# Altium PCB NAPaC_PCB1.PcbDoc
Units mm, origin at the board's own origin, x right, y up, seen from the top; angles counter-clockwise.
Board outline 59.06 x 40.1 mm, 2 copper layers (Top Layer, Bottom Layer); 50 components, 46 nets, 234 pads, 44 vias.
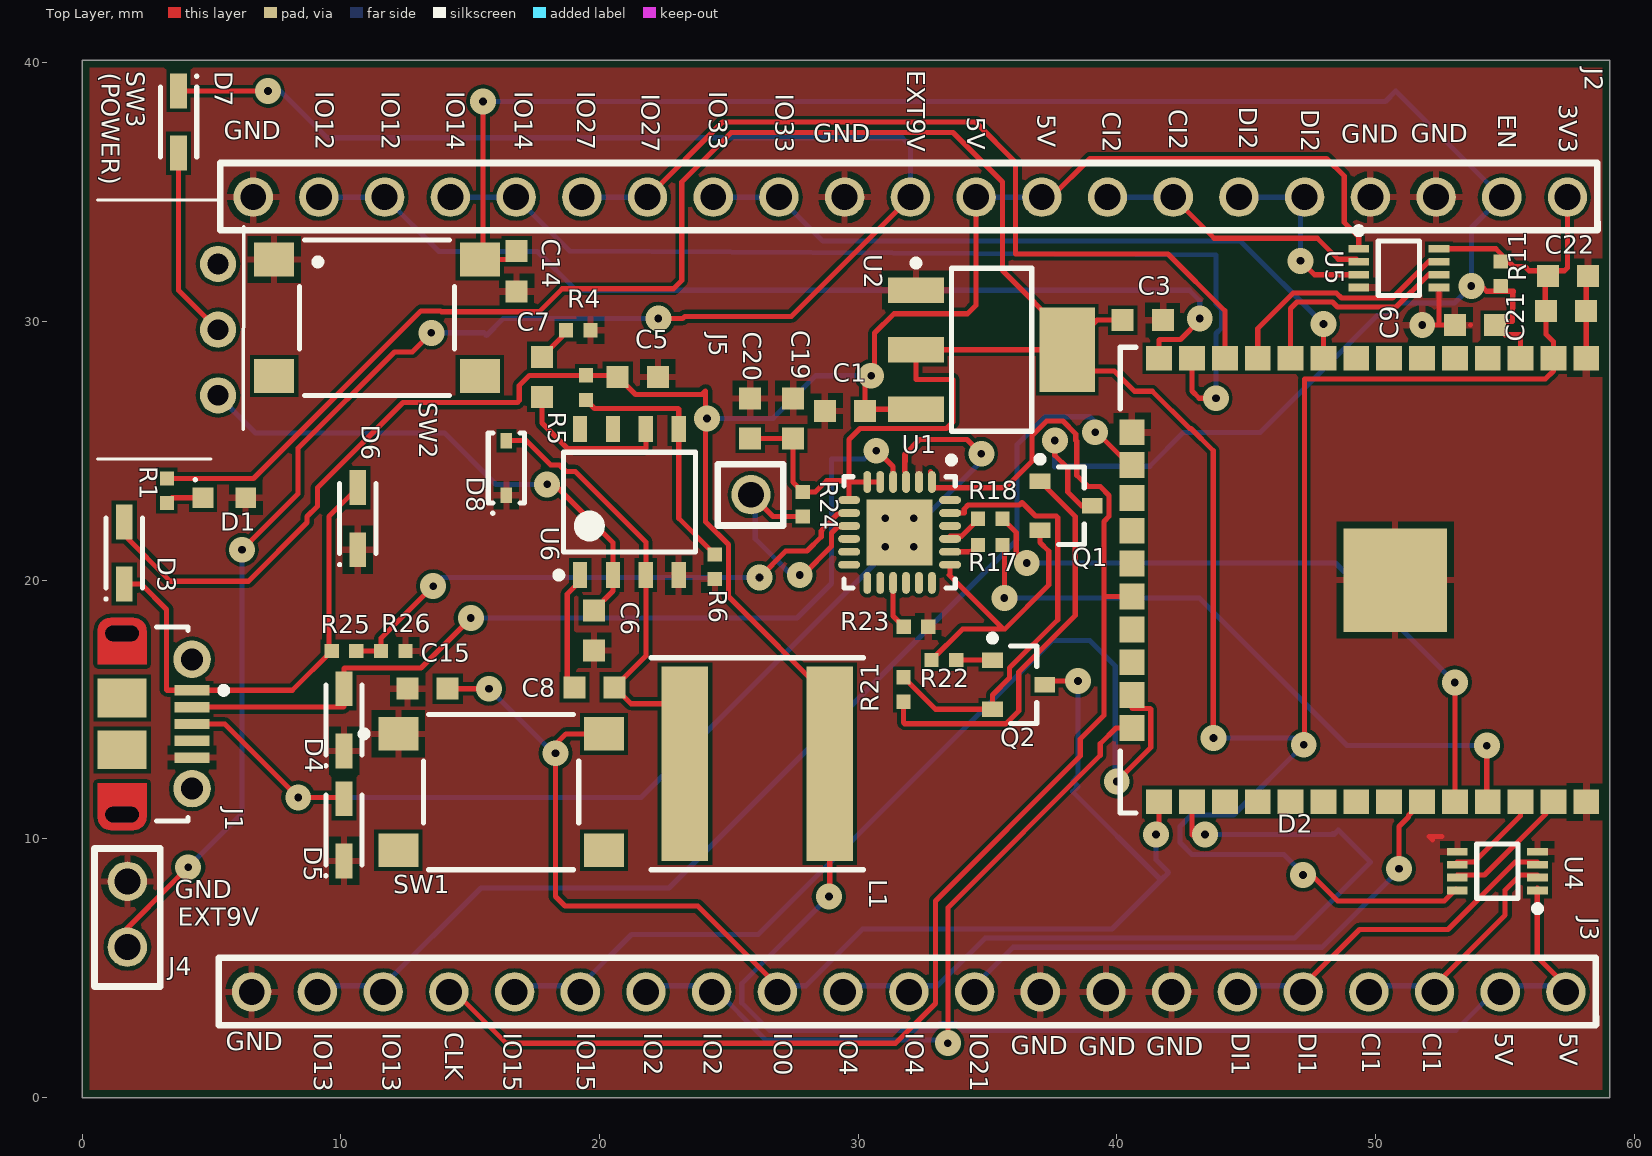
[diagram p0: Top Layer view]
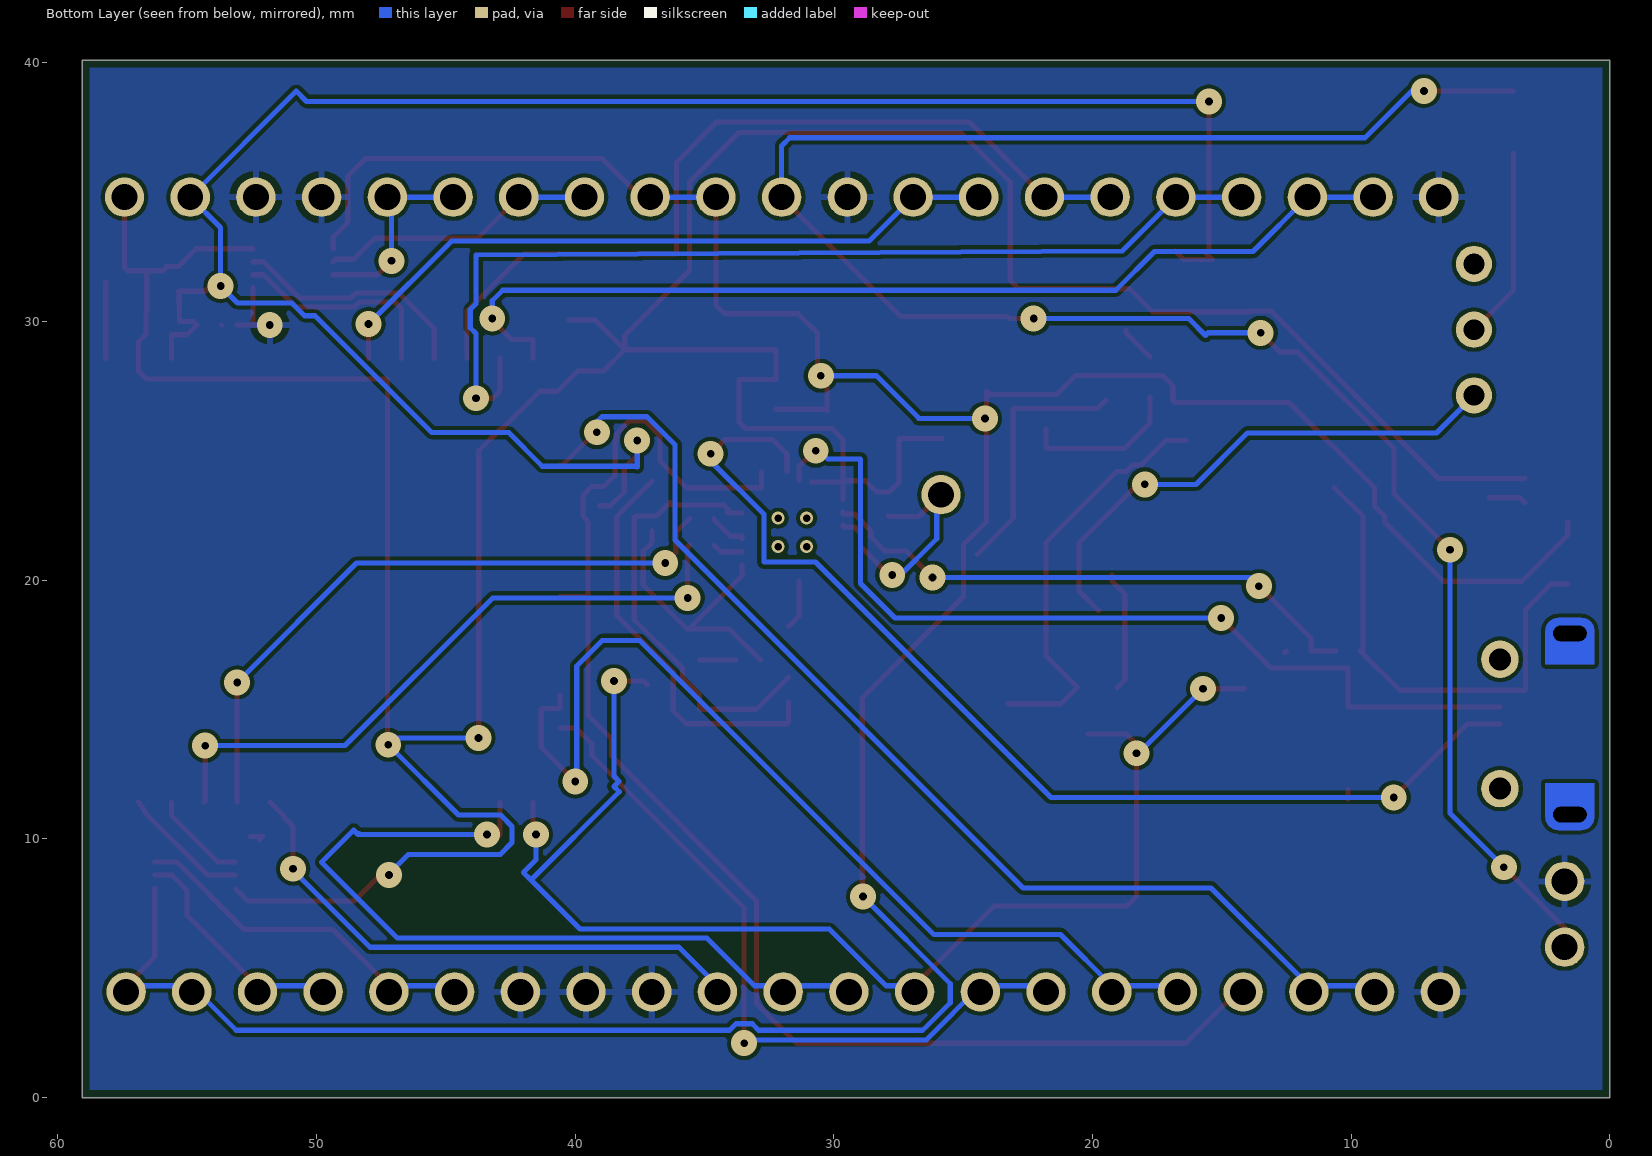
[diagram p1: Bottom Layer view, seen from below]
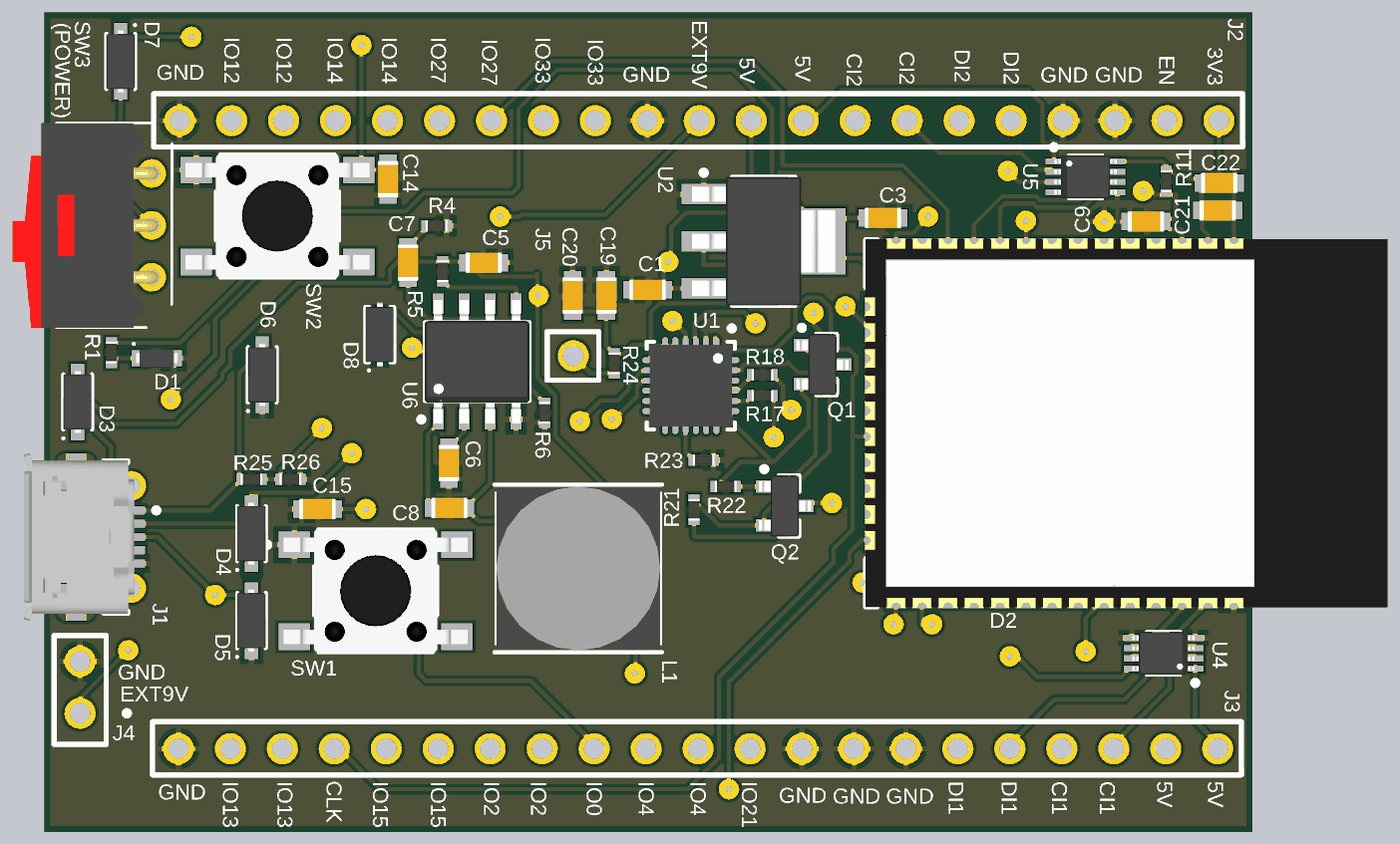
[diagram p2: 3D render of the assembled board from above, using the file's embedded part models]

## Layer stack, top to bottom
Top Solder: solder mask 0.0102, Solder Resist, Dk 3.5
Top Layer: signal copper 0.0356
Dielectric 1: dielectric 0.32, FR-4, Dk 4.8
Bottom Layer: signal copper 0.0356
Bottom Solder: solder mask 0.0102, Solder Resist, Dk 3.5

## Board outline
0,0 59.057,0 59.057,40.1 0,40.1

## Design rules (kind name [scope] priority, off if disabled: settings)
BoardOutlineClearance [All] p1: gap=0.3 ignorepadtopadclearanceinfootprint=FALSE
Clearance Clearance_1 [All] p1: gap=0.15 ignorepadtopadclearanceinfootprint=TRUE
HoleSize [All] p1: absolutevalues=TRUE maxlimit=2.54 minlimit=0.3 maxpercent=80.000 minpercent=20.000
HoleToHoleClearance [All] p1: gap=0.5 allowstackedmicrovias=TRUE
MinimumSolderMaskSliver [All] p1: minsoldermaskwidth=0.1
PlaneConnect [All] p1: planeconnectstyle=Relief reliefexpansion=0.3 reliefentries=4 reliefconductorwidth=0.2 reliefairgap=0.2
PolygonConnect [All] p1: connectstyle=Relief reliefconductorwidth=0.254 reliefentries=4 polygonreliefangle="90 Angle" airgapwidth=0.254
RoutingVias [All] p1: holewidth=0.5 width=1.2 viastyle="Through Hole" minholewidth=0.3 minwidth=1 maxholewidth=1.5 maxwidth=2.5
SilkToSilkClearance [All] p1: silktosilkclearance=0.15
SilkToSolderMaskClearance [IsPad] p1: minsilkscreentomaskgap=0.15 clearancetoexposedcopper=TRUE
SolderMaskExpansion [All] p1: expansion=0.05
UnRoutedNet [All] p1: checkbadconnections=TRUE
Width [All] p1: maxlimit=2 minlimit=0.15 preferedwidth=0.2
23 further rules are at their usual default settings.

## Components (designator, comment, footprint, x,y, rotation, side; value= is the part's Value field where it differs from the comment)
C1 "22uF/10V(20%)" CAPC0603 29.492,26.533 r0 top
C3 "22uF/10V(20%)" CAPC0603 40.999,30.047 r180 top
C5 "22uF/10V(20%)" CAPC0603 21.48,27.857 r180 top
C6 "10µF/35V(20%)" CAPC0603 19.78,18.057 r90 top
C7 "2.2nF/6.3V(10%)" CAPC0603 17.78,27.857 r270 top
C8 "10nF/50V(10%)" CAPC0603 19.805,15.857 r0 top
C9 "0.1uF/50V(10%)" CAPC0603 53.846,29.863 r0 top
C14 "0.1uF/50V(10%)" CAPC0603 16.799,31.939 r90 top
C15 "0.1uF/50V(10%)" CAPC0603 13.357,15.8 r0 top
C19 "0.1uF/50V(10%)" CAPC0603 27.478,26.248 r270 top
C20 "4.7uF/6.3V(10%)" CAPC0603 25.827,26.248 r270 top
C21 "22uF/10V(20%)" CAPC0603 57.357,30.409 r180 top
C22 "0.1uF/50V(10%)" CAPC0603 57.429,31.758 r180 top
D1 "SML-D12U1WT86" SML-D12U1WT86 5.5,23.18 r0 top
D2 "ESP32-WROOM-32" OLMX-ESP-WROOM-32 49.362,20 r270 top
D3 "BAT760" SOD-323 1.63,21.042 r90 top
D4 "CDSOD323-T05LC" SOD-323 10.126,14.6 r90 top
D5 "CDSOD323-T05LC" SOD-323 10.126,10.347 r90 top
D6 "CDSOD323-T05LC" SOD-323 10.657,22.372 r90 top
D7 "BAT760" SOD-323 3.731,37.7 r270 top
D8 "B140WS-7" SOD-323-SCHOTTKY_DIODE-40V/1A 16.399,24.335 r90 top
J1 "47491-0001" USB-MICRO-B_V 2.9,14.438 r270 top
J2 "CON_21P" PINS_HEADER-21 57.417,34.8 r180 top
J3 "CON_21P" PINS_HEADER-21 57.357,4.08 r180 top
J4 "CON_2P" PINS_ALIM-2 1.75,5.815 r90 top
J5 "PIN_TESTPOINT" PIN_TESTPOINT 25.857,23.3 r0 top
L1 "15uH/2.4A" NRS8040-SELF-15uH/2.4A 26.1,12.9 r0 top
Q1 "S8050-G-NPN" SOT23 38.038,22.87 r0 top
Q2 "S8050-G-NPN" SOT23 36.199,15.957 r0 top
R1 "2K(5%)" RC0402 3.281,23.455 r90 top
R4 "15K(5%)" RC0402 19.18,29.657 r180 top
R5 "28.7K(1%)" RC0402 19.48,27.438 r90 top
R6 "10K(1%)" RC0402 24.457,20.516 r90 top
R11 "10K(5%)" RC0402 54.835,31.841 r90 top
R17 "0R(5%)" RC0402 35.102,21.356 r180 top
R18 "0R(5%)" RC0402 35.102,22.372 r180 top
R21 "10K(5%)" RC0402 31.754,15.769 r270 top
R22 "10K(5%)" RC0402 33.311,16.907 r0 top
R23 "10K(5%)" RC0402 32.232,18.2 r180 top
R24 "2K(5%)" RC0402 27.857,22.93 r270 top
R25 "22.1K(5%)" RC0402 10.126,17.262 r0 top
R26 "47.5K(5%)" RC0402 12.031,17.262 r180 top
SW1 "PTS645S" CKCP-PTS645S_V 16.199,11.806 r0 top
SW2 "PTS645S" CKCP-PTS645S_V 11.399,30.139 r0 top
SW3 "SWITCH_SLIDE" SW_SLIDE 5.255,29.679 r90 top
U1 "CP2102N-A01-GQFN24" CP2102N-GQFN24 31.6,21.842 r270 top
U2 "LM1117IMP3.3/NOPB" LM1117 35.157,28.904 r0 top
U4 "SN74LVC2T45DCTRE4" VOLTAGE_TRANSLATOR_3.3-5V 54.707,8.75 r180 top
U5 "SN74LVC2T45DCTRE4" VOLTAGE_TRANSLATOR_3.3-5V 50.9,32.054 r0 top
U6 "ACT4060ASH-T" SWITCHING_VOLTAGE_REGULATOR 21.157,23.016 r90 top

## Footprints (in the part's own frame and the unit in brackets; to place one, negate y for a bottom-side part, rotate by r counter-clockwise, add the part's x,y. Pads: shape width x height; smd on the part's side, far side on the other; paste and mask are expansions set on the pad)
CAPC0603 [mm] "Chip Capacitor, 2-Leads, Body 1,60x0,80mm, IPC Medium Density"
  rect 0.85x0.85 smd: 1(-0.775,0) 2(0.775,0)
  body extent -0.9,-0.5 0.9,0.5, height 1
CKCP-PTS645S_V [mm] "THD, 4-Leads, Body 6x6mm, Pitch 4.5mm"
  rect 1.55x1.3 smd: 1(-3.975,2.25) 2(3.975,2.25) 3(-3.975,-2.25) 4(3.975,-2.25)
  silkscreen extent -5.42,-3 3,3, body extent -4.5,-3 4.5,3, height 4.3
CP2102N-GQFN24 [mm] "QFN, 24-Leads, Body 4,00x4,00mm, Pitch 0,50mm, Thermal Pad 2,55x2,55mm, IPC Medium Density"
  oval 0.85x0.3 smd: 1(-1.95,1.25) 2(-1.95,0.75) 3(-1.95,0.25) 4(-1.95,-0.25) 5(-1.95,-0.75) 6(-1.95,-1.25) 13(1.95,-1.25) 14(1.95,-0.75) 15(1.95,-0.25) 16(1.95,0.25) 17(1.95,0.75) 18(1.95,1.25)
  oval 0.3x0.85 smd: 7(-1.25,-1.95) 8(-0.75,-1.95) 9(-0.25,-1.95) 10(0.25,-1.95) 11(0.75,-1.95) 12(1.25,-1.95) 19(1.25,1.95) 20(0.75,1.95) 21(0.25,1.95) 22(-0.25,1.95) 23(-0.75,1.95) 24(-1.25,1.95)
  rect 2.55x2.55 smd: 25(0,0)
  silkscreen extent -2.92,-2.15 2.15,2.15, body extent -2.01,-2.01 2.01,2.01, height 0.8
LM1117 [mm] "SOT223, 4-Leads, Body 6,50x7,00mm (avg), Pitch 2,30mm, IPC Medium Density"
  rect 2.15x1 smd: 1(-2.925,2.3) 2(-2.925,0) 3(-2.925,-2.3)
  rect 2.15x3.25 smd: 4(2.925,0)
  silkscreen extent -3.05,-3.15 1.55,3.47, body extent -3.5,-3.15 3.5,3.15, height 1.8
NRS8040-SELF-15uH/2.4A [mm] "Precision Wire Wound Inductor, 2-Leads, Body 8,00x8,00mm, IPC Medium Density"
  rect 1.8x7.5 smd: 1(-2.8,0) 2(2.8,0)
  silkscreen extent -4.1,-4.1 4.1,4.1, body extent -4.1,-4 4.1,4, height 4.1
OLMX-ESP-WROOM-32 [mm] "SMD, 38-Leads, Body 18x25.5mm, Pitch 1.27mm"
  rect 0.95x1 smd: 1(-8.575,8.78) 2(-8.575,7.51) 3(-8.575,6.24) 4(-8.575,4.97) 5(-8.575,3.7) 6(-8.575,2.43) 7(-8.575,1.16) 8(-8.575,-0.11) 9(-8.575,-1.38) 10(-8.575,-2.65) 11(-8.575,-3.92) 12(-8.575,-5.19) 13(-8.575,-6.46) 14(-8.575,-7.73) 25(8.575,-7.73) 26(8.575,-6.46) 27(8.575,-5.19) 28(8.575,-3.92) 29(8.575,-2.65) 30(8.575,-1.38) 31(8.575,-0.11) 32(8.575,1.16) 33(8.575,2.43) 34(8.575,3.7) 35(8.575,4.97) 36(8.575,6.24) 37(8.575,7.51) 38(8.575,8.78)
  rect 4x4 smd: 1(0,1.395)
  rect 1x0.95 smd: 15(-5.715,-8.78) 16(-4.445,-8.78) 17(-3.175,-8.78) 18(-1.905,-8.78) 19(-0.635,-8.78) 20(0.635,-8.78) 21(1.905,-8.78) 22(3.175,-8.78) 23(4.445,-8.78) 24(5.715,-8.78)
  silkscreen extent -9,-9.23 9,-8.63, body extent -9.04,-9.25 9.04,16.29, height 3.04
PIN_TESTPOINT [mil]
  round 60 hole 39.37: 1(0,0)
  silkscreen extent -50,-47 49,46
PINS_ALIM-2 [mil]
  round 60 hole 39.37: 1(0,0) 2(100,0)
  round 20 on Top Overlay: ""(0,-90)
  silkscreen extent -60,-50 150,50
PINS_HEADER-21 [mil]
  round 60 hole 39.37: 1(0,0) 2(100,0) 3(200,0) 4(300,0) 5(400,0) 6(500,0) 7(600,0) 8(700,0) 9(800,0) 10(900,0) 11(1000,0) 12(1100,0) 13(1200,0) 14(1300,0) 15(1400,0) 16(1500,0) 17(1600,0) 18(1700,0) 19(1800,0) 20(1900,0) 21(2000,0)
  silkscreen extent -46,-52 2050,50
RC0402 [mm] "Chip Resistor, 2-Leads, Body 1,02x0,50mm, IPC Medium Density"
  rect 0.55x0.55 smd: 1(-0.475,0) 2(0.475,0)
  body extent -0.53,-0.28 0.53,0.28, height 0.4
SML-D12U1WT86 [mm] "Molded Diode, 2-Leads, Body 1,60x0,80mm, IPC Medium Density"
  rect 0.8x0.8 smd: 1(-0.825,0) 2(0.825,0)
  silkscreen extent -1.17,0.65 -1.07,0.75, body extent -1.07,-0.45 1.07,0.45, height 0.65
SOD-323 [mm]
  rect 1.35x0.65 smd: 1(-1.2,0) 2(1.2,0)
  silkscreen extent -1.82,-0.7 1.35,0.75, body extent -1.57,-0.7 1.57,0.7, height 1.1
SOD-323-SCHOTTKY_DIODE-40V/1A [mm]
  rect 0.59x0.45 smd: 1(-1.055,0) 2(1.055,0)
  silkscreen extent -1.8,-0.7 1.35,0.7, body extent -1.57,-0.7 1.57,0.7, height 1.1
SOT23 [mm] "SOT23, 3-Leads, Body 2,90x2,40mm, Pitch 0,95mm, IPC Medium Density"
  rect 0.8x0.6 smd: 1(-1.01,0.95) 2(-1.01,-0.95) 3(1.01,0)
  silkscreen extent -1.13,-1.5 0.7,1.92, body extent -1.28,-1.5 1.28,1.5, height 1.1
SW_SLIDE [mm]
  round 1.4 hole 0.8: 1(0,0) 2(-2.54,0) 3(2.54,0)
  silkscreen extent -5,-0.99 5.01,4.66, body extent -5,-0.3 5,6.8, height 2.51
SWITCHING_VOLTAGE_REGULATOR [mm]
  rect 1x0.55 smd: 1(-2.825,1.905) 2(-2.825,0.635) 3(-2.825,-0.635) 4(-2.825,-1.905) 5(2.825,-1.905) 6(2.825,-0.635) 7(2.825,0.635) 8(2.825,1.905)
  silkscreen extent -2.95,-2.55 1.92,2.85, body extent -3.03,-2.55 3.03,2.55, height 1.75
USB-MICRO-B_V [mm] "USB, MICRO B, Body 7.491x4.695 mm, Pitch 0.65 mm"
  rect 0.4x1.35 smd: 1(-1.3,1.35) 2(-0.65,1.35) 3(0,1.35) 4(0.65,1.35) 5(1.3,1.35)
  rrect50% 0x0 hole 0.6 slot 1.3 at 90 deg: 8(-3.5,-1.35) 11(3.5,-1.35)
  round 1.45 hole 0.85: ""(-2.5,1.35) ""(2.5,1.35)
  rect 1.5x1.9 smd: ""(-1,-1.35) ""(1,-1.35)
  Multi-Layer circle w0.5: c-3.6,-1.8 r0.25
  Multi-Layer circle w0.5: c-3.6,-0.9 r0.25
  Multi-Layer circle w0.5: c3.6,-0.9 r0.25
  Multi-Layer circle w0.5: c3.6,-1.8 r0.25
  Multi-Layer region: -2.3,-2.3 -2.3,-0.4 -3.6,-0.4 -3.6,-2.3
  Multi-Layer region: -3.6,-1.8 -3.6,-0.9 -4.1,-0.9 -4.1,-1.8
  Multi-Layer region: 2.3,-0.4 2.3,-2.3 3.6,-2.3 3.6,-0.4
  Multi-Layer region: 3.6,-0.9 3.6,-1.8 4.1,-1.8 4.1,-0.9
  silkscreen extent -3.75,-0.01 3.75,2.7, body extent -4.1,-3.9 4.1,1.5, height 2.67
VOLTAGE_TRANSLATOR_3.3-5V [mm] "TSSOP, 8-Leads, Body 2,00x2,30mm, Pitch 0,50mm, IPC Medium Density"
  rect 0.8x0.3 smd: 1(-1.55,0.75) 2(-1.55,0.25) 3(-1.55,-0.25) 4(-1.55,-0.75) 5(1.55,-0.75) 6(1.55,-0.25) 7(1.55,0.25) 8(1.55,0.75)
  silkscreen extent -1.68,-1.05 0.8,1.57, body extent -1.55,-1.05 1.55,1.05, height 0.9

## Part data
C1 C3 C5 C21: library part CAP-22uF/10V(20%), "GRM188R61A226ME15D-22uF/10V(20%)", Supplier Part Number 1=490-10476-6-ND, Supplier 1=Digi-Key
C6: library part CAP-10µF/35V(20%), "C0603C106M8PACTU", Supplier Part Number 1=80-C0603C106M8PACTU, Supplier 1=Mouser
C7: library part CAP-2.2nF/6.3V(10%), "C0603X7R0J222K030BA", Supplier Part Number 1=810-C0603X7R0J222K0A, Supplier 1=Mouser
C8: library part CAP-10nF/50V(10%), "C1608X7R1H103K080AE", Supplier Part Number 1=810-C1608X7R1H103KAE, Supplier 1=Mouser
C9 C14 C15 C19 C22: library part CAP-0.1uF/50V(10%), "GRM188R71H104KA93D-0.1uF/50V(10%)", Supplier Part Number 1=16520001, Supplier 1=Distrelec
C20: library part CAP-0.4uF/6.3V(10%), "GRT188C80J475KE01D", Supplier Part Number 1=81-GRT188C80J475KE1D, Supplier 1=Mouser
D1: library part RED_LED, "SML-D12U1WT86-2.2V-20mA", Supplier Part Number 1=755-SML-D12U1WT86, Supplier 1=Mouser
D2: library part ESP-WROOM-32, Supplier Part Number 1=356-ESP-WROOM-32, Supplier 1=Mouser
D3 D7: library part SchottkyDiode, "BAT760-7-Schottky Diodes & Rectifiers 0.5A 30V LF", Supplier Part Number 1=BAT760-7/BKN, Supplier 1=Avnet
D4 D5 D6: library part BidirectionalDiode, Supplier Part Number 1=652-CDSOD323-T05LC, Supplier 1=Mouser
D8: library part SCHOTTKY_DIODE-40V/3A, "Diode Schottky 40V 1A 2-Pin SOD-323 T/R", Supplier Part Number 1=621-B140WS-7, Supplier 1=Mouser
J1: library part USB_CON8, "USB Connectors MICRO USB B RECPT MIDDLE MNT ASSY", Supplier Part Number 1=30076400, Supplier 1=Distrelec
J2 J3: library part PINS_HEADER, "21 Positions Header, Breakaway Connector 0.100\" (2.54mm) Through Hole Tin", Supplier Part Number 1=S1012EC-21-ND, Supplier 1=Digi-Key
J4: library part PIN_ALIM, "2 Positions Header, Breakaway Connector 0.100\" (2.54mm) Through Hole Tin"
J5: "1 Position Header, Breakaway Connector 0.100\" (2.54mm) Through Hole Tin"
L1: library part SELF-15uH/2.4A, "NRS8040T150MJGJ", Supplier Part Number 1=963-NRS8040T150MJGJ, Supplier 1=Mouser
Q1: library part SS8050-G-NPN, "750-SS8050-G-BJT NPN SOT-23-3 TRANSISTOR 1.5A 40V", Supplier Part Number 1=750-SS8050-G, Supplier 1=Mouser
Q2: library part SS8050-G-NPNbis, "750-SS8050-G-BJT NPN SOT-23-3 TRANSISTOR 1.5A 40V"
R1 R24: library part RESISTOR-2K(5%), "RC0402JR-072KL", Supplier Part Number 1=67R9979, Supplier 1=Newark
R4: library part RESISTOR-15K(5%), "RC0402JR-7D43KL", Supplier Part Number 1=603-RC0402JR-7D43KL, Supplier 1=Mouser
R5: library part RESISTOR-28.7K(1%), "RC0402JR-072K7L", Supplier Part Number 1=67R9981, Supplier 1=Newark
R6: library part RESISTOR-10K(1%), "RC0402F103CS", Supplier Part Number 1=1276-3530-6-ND, Supplier 1=Digi-Key
R11 R21 R22 R23: library part RESISTOR-10K(5%), "RC0402JR-0710KL", Supplier Part Number 1=67R9964, Supplier 1=Newark
R17 R18: library part RESISTOR-0R(5%), "RC0402JR-070RL", Supplier Part Number 1=67R9963, Supplier 1=Newark
R25: library part RESISTOR-22.1K(5%), "RC0402FR-0722K1L", Supplier Part Number 1=RC0402FR-0722K1L**MULT1, Supplier 1=Arrow
R26: library part RESISTOR-47.5K(5%), "RC0402FR-0747K5L", Supplier Part Number 1=2781938, Supplier 1="Future Electronics"
SW1 SW2: library part SW, "PTS645SL432LFS", Supplier 1=Avnet, Supplier Part Number 1=PTS645SL432LFS
SW3: "48ASSP1S1M6QBT", Supplier Part Number 1=11087397, Supplier 1=Distrelec
U1: library part CP2102N-GQFN24, Supplier Part Number 1=336-3693-ND, Supplier 1=Digi-Key
U2: library part LM1117-3.3, Supplier Part Number 1=173-06-781, Supplier 1=Distrelec
U4 U5: library part VOLTAGE_TRANSLATOR_3.3-5V, "Translation - Voltage Levels DUAL-BIT DUAL SUPPLY TRANSCEIVER", Supplier Part Number 1=9592768, Supplier 1=Farnell
U6: library part SWITCHING_VOLTAGE_REGULATOR, Supplier Part Number 1=107-ACT4060ASH-T, Supplier 1=Mouser

## Via types
v1: diameter 1, hole 0.3, Top Layer to Bottom Layer, 40 vias
v2: diameter 0.5, hole 0.3, Top Layer to Bottom Layer, 4 vias

## Nets (pads, with @x,y where several pads share a name; then routed paths per layer and width w, separated by ;. In a path a pad name is that pad's centre, name@x,y a point inside that pad or via, vN(x,y) a via of type N, cw(c..) or ccw(c..) an arc to the next point about the centre after c; other vN are vias at no path point)
3V3: C3.2 C19.2 C20.2 C21.2 C22.2 D2.2 J2.1 R1.2 R11.2 R24.1 U1.5 U1.6 U1.7 U2.2 U2.4 U4.8 U5.8 | length 151.5
  Top Layer w0.2: R1.2 6.629,23.93 13.105,30.407 13.852,30.407 13.888,30.371 17.669,30.371 18.558,31.26 22.861,31.26 23.178,31.577 23.178,35.387 25.091,37.3 33.661,37.3 35.574,35.387 35.574,31.965 38.082,29.457 U2.4 ; C20.2 C19.2 27.478,23.785 27.862,23.4 28.34,23.4 28.782,23.842 29.65,23.842 ; U1.7 29.65,23.842 ; U1.5 U1.6 29.7,23.792 29.65,23.842 ; C3.2 39.225,30.047 U2.4 ; v1(43.737,13.9) 43.72,13.917 43.72,25 42.866,25.854 42.815,25.854 41.369,27.3 40.685,27.3 39.9,28.085 38.901,28.085 U2.4 ; v1(47.197,8.6) 47.531,8.6 48.536,7.595 52.652,7.595 U4.8@53.107,8.05 ; v1@47.245,13.635 47.245,27.767 56.554,27.767 56.872,28.085 D2.2 56.872,29.21 56.582,29.5 C21.2 56.554,30.436 C22.2@56.554,31.958 ; U5.8 54.647,32.804 55.335,32.116 ; 55.187,32.264 55.335,32.116 ; J2.1 57.417,32.075 57.3,31.958 C22.2@56.554,31.958 ; 29.65,23.842 29.65,25.433 30.071,25.854 33.41,25.854 33.663,26.106 33.663,27.75 32.232,27.75 U2.2 U2.4 ; 55.335,32.116 55.769,32.116 55.927,31.958 C22.2@56.554,31.958
  Bottom Layer w0.2: v1(43.737,13.9) 46.958,13.9 v1(47.223,13.635) 47.223,13.632 44.508,10.917 43.494,10.917 42.873,10.917 42.433,10.478 42.433,9.857 42.892,9.398 46.451,9.398 47.223,8.626 v1(47.197,8.6)
ACTIVE: R23.2 U1.15 | length 1.9
  Top Layer w0.2: U1.15@31.346,19.952 31.346,18.611 R23.2
CI1: J3.3 J3.4 U4.2 | length 8.9
  Top Layer w0.2: J3.3@52.277,4.32 55.007,7.05 55.007,8.018 55.589,8.6 U4.2@56.257,8.6
  Bottom Layer w0.2: J3.4@49.737,4.32 J3.3@52.277,4.32
CI2: J2.7 J2.8 U5.2 | length 10.7
  Top Layer w0.2: J2.7 43.761,33.216 47.747,33.216 48.559,32.404 49.25,32.404 U5.2
  Bottom Layer w0.2: J2.8 J2.7
CLK: D2.20 J3.18 U1.1 | length 55.1
  Top Layer w0.2: J3.18@14.177,4.32 16.397,2.1 31.445,2.1 32.983,3.637 32.983,7.6 38.583,13.2 38.583,13.858 39.5,14.775 39.5,19.365 ; U1.1@32.796,24.195 32.796,23.57 35.695,23.57 36.718,24.593 36.718,25.578 37.289,26.15 37.911,26.15 38.409,25.651 38.409,25.404 38.45,25.364 38.45,24.053 38.888,23.615 39.356,23.615 39.698,23.274 39.698,22.466 39.5,22.269 39.5,19.365 ; D2.20 39.5,19.365
DI1: J3.5 J3.6 U4.3 | length 13.6
  Top Layer w0.2: J3.5@47.197,4.32 49.372,6.495 52.793,6.495 55.398,9.1 U4.3@56.257,9.1
  Bottom Layer w0.2: J3.6@44.657,4.32 J3.5@47.197,4.32
DI2: J2.5 J2.6 U5.3 | length 7.5
  Top Layer w0.2: v1(47.1,32.339) 47.635,31.804 U5.3
  Bottom Layer w0.2: J2.6 J2.5 47.1,34.643 v1(47.1,32.339)
DTRb: Q2.2 R21.1 U1.23 | length 17.1
  Top Layer w0.2: R21.1 32.991,15.007 Q2.2 35.189,15.559 35.853,16.223 35.853,16.607 37.713,18.468 37.713,22.415 37.656,22.472 36.859,22.472 36.336,22.995 36.238,22.897 34.249,22.897 34.102,22.75 34.102,22.592 U1.23
EN: C9.2 C14.2 D2.3 J2.2 Q1.3 R11.1 SW2.2 | length 82.3
  Top Layer w0.2: v1(15.5,38.5) 15.5,32.714 15.6,32.614 SW2.2 16.474,32.389 C14.2@16.799,32.714 ; v1(37.6,25.4) 37.6,24.827 38.1,24.327 38.1,23.406 38.636,22.87 Q1.3 ; v1(53.7,31.364) v1@54.1,31.364 ; D2.3 55.602,29.482 55.002,29.482 C9.2 54.758,30 55.296,30 55.296,30.522 55.3,30.526 55.3,31.116 55.335,31.166 54.298,31.166 ; v1@54.1,31.364 54.298,31.166 ; v1@54.1,31.364 54.298,31.166
  Bottom Layer w0.2: v1(15.5,38.5) 50.377,38.5 50.777,38.9 J2.2 53.7,33.623 v1(53.7,31.364) 53.05,30.714 50.951,30.714 50.453,30.216 50.054,30.216 45.538,25.7 42.567,25.7 41.267,24.4 37.63,24.4 37.6,24.37 v1(37.6,25.4)
EXT_5V: C1.2 C5.2 D3.2 J2.9 J2.10 J3.1 J3.2 L1.2 R5.2 U2.3 U4.1 U5.1 | length 131.7
  Top Layer w0.2: D3.2 1.63,21.737 3.41,19.957 6.436,19.957 8.7,22.222 8.7,22.457 9.1,22.857 9.1,23.566 12.4,26.866 16.827,26.866 16.9,26.939 16.9,27.515 17.298,27.913 20.648,27.913 C5.2 21.391,27.171 23.966,27.171 24.1,27.305 24.1,22.252 24.982,21.37 24.982,19.362 28.9,15.443 L1.2 28.9,7.797 v1(28.868,7.765) ; U2.3 30.267,26.604 C1.2 30.267,27.667 v1(30.5,27.9) 30.633,28.033 30.633,29.545 31.382,30.294 34.226,30.294 34.557,30.625 J2.10 ; J2.9 37.457,34.8 38.957,36.3 48.1,36.3 48.785,35.615 48.785,33.816 49.35,33.25 U5.1 ; U4.1@56.257,8.1 56.249,8.1 56.249,5.428 J3.1@57.357,4.32
  Bottom Layer w0.2: v1(24.159,26.248) 26.728,26.248 26.728,26.276 28.352,27.9 v1(30.5,27.9) ; v1(28.868,7.765) 25.5,4.397 25.5,3.665 26.565,2.6 32.905,2.6 33.155,2.85 33.776,2.85 34.026,2.6 53.097,2.6 54.817,4.32 J3.1@57.357,4.32 ; J2.10 J2.9
EXT_9V: D7.1 J2.11 J4.1 | length 81.1
  Top Layer w0.2: J4.1@1.099,5.899 v1(4.101,8.9) ; D7.1 v1(7.191,38.9) ; v1(6.184,21.171) 8.35,23.338 8.35,25.093 12.078,28.821 12.765,28.821 v1(13.5,29.557) ; v1(22.275,30.107) 23.213,30.107 23.3,30.193 27.41,30.193 J2.11
  Bottom Layer w0.2: v1(4.101,8.9) 6.184,10.983 v1(6.184,21.171) ; v1(7.191,38.9) 7.664,38.9 9.464,37.1 31.7,37.1 32.017,36.783 J2.11 ; v1(13.5,29.557) 15.528,29.557 15.628,29.457 16.278,30.107 v1(22.275,30.107)
GND: C1.1 C3.1 C5.1 C6.1 C9.1 C14.1 C15.1 C19.1 C20.1 C21.1 C22.1 D1.2 D2.1 D2.15 D2.38 D4.1 D5.1 D6.1 D8.1 J1.5 J2.3 J2.4 J2.12 J2.21 J3.7 J3.8 J3.9 J3.21 J4.2 R4.1 R6.1 R23.1 R26.1 SW1.1 SW2.1 U1.2 U2.1 U4.4 U4.5 U5.4 U5.5 U6.4 | length 6.4
  Top Layer w0.2: R26.1 R26.1@12.582,17.186 ; v1(51.8,29.864) 52.45,29.864 ; 52.2,9.966 52.073,10.093 52.564,10.093 ; U5.5 52.45,29.864 ; C9.1 53.07,29.864 52.45,29.864 ; 53.67,29.864 53.671,29.863 ; D2.1@58.142,28.575 C22.1@58.142,31.514
IO0: C15.2 D2.25 J3.13 Q2.3 SW1.2 | length 54.2
  Top Layer w0.2: C15.2 v1(15.726,15.8) ; SW1.2 18.7,14.056 18.3,13.656 18.3,7.765 18.665,7.4 23.797,7.4 J3.13@26.877,4.32 ; Q2.3 37.353,16.1 v1(38.5,16.1) ; v1(41.51,10.167) 41.871,10.167 41.632,10.406 D2.25
  Bottom Layer w0.2: v1(15.726,15.8) 18.22,13.306 v1(18.3,13.306) ; J3.13@26.877,4.32 27.986,4.32 30.175,6.509 39.809,6.509 41.703,8.403 ; v1(38.5,16.1) 38.5,12.424 38.3,12.224 38.5,12.024 38.291,11.815 41.703,8.403 ; v1(41.51,10.167) 41.51,9.19 42,8.7 41.703,8.403
IO2: D2.24 J3.14 J3.15 | length 28.1
  Top Layer w0.2: v1(33.465,2.1) 33.465,7.335 39.357,13.226 39.357,13.674 39.968,14.285 D2.24
  Bottom Layer w0.2: J3.15@21.797,4.32 24.337,4.32 26.429,2.228 33.338,2.228 v1(33.465,2.1)
IO4: D2.26 J3.11 J3.12 | length 31.4
  Top Layer w0.2: D2.26 42.902,10.15 42.919,10.167 v1(43.4,10.167)
  Bottom Layer w0.2: J3.12@29.417,4.32 31.957,4.32 33.066,4.32 34.905,6.159 46.859,6.159 49.797,9.097 48.557,10.337 48.387,10.167 48.354,10.2 48.322,10.167 v1@43.183,10.167
IO12: D2.14 J2.19 J2.20 | length 39
  Top Layer w0.2: D2.14 41.632,29.279 41.657,29.304 42.457,29.304 43.2,30.047 v1(43.2,30.107)
  Bottom Layer w0.2: J2.20 J2.19 13.797,32.7 17.6,32.7 19.1,31.2 42.794,31.2 43.2,30.794 v1(43.2,30.107)
IO13: D2.16 J3.19 J3.20 | length 43.8
  Top Layer w0.2: v1(39.159,25.715) 39.222,25.715 40.537,24.4 D2.16
  Bottom Layer w0.2: J3.20@9.097,4.32 11.637,4.32 15.417,8.1 22.686,8.1 36.132,21.547 36.132,25.227 37.215,26.31 38.957,26.31 39.225,26.042 39.159,25.977 v1(39.159,25.715)
IO14: D2.13 J2.17 J2.18 | length 38.5
  Top Layer w0.2: D2.13 42.902,27.31 43.183,27.029 v1(43.829,27.029)
  Bottom Layer w0.2: J2.18 J2.17 18.852,32.724 43.829,32.57 43.829,30.68 44.05,30.459 44.05,29.754 43.829,29.533 v1(43.829,27.029)
IO15: D2.23 J3.16 J3.17 | length 38.2
  Top Layer w0.2: v1(39.993,12.21) 41.307,13.524 41.307,15.004 41.276,15.035 40.602,15.035 40.582,15.055 D2.23
  Bottom Layer w0.2: J3.17@16.717,4.32 19.257,4.32 21.237,6.3 26.133,6.3 37.5,17.667 38.952,17.667 39.935,16.684 v1@39.935,12.269
IO21: D2.33 J3.10 | length 21.4
  Top Layer w0.2: v1(50.9,8.844) 50.9,10.475 51.272,10.846 51.272,10.905 D2.33
  Bottom Layer w0.2: J3.10@34.497,4.32 35.986,5.809 47.931,5.809 50.966,8.844 v1(50.9,8.844)
IO22: D2.36 U4.6 | length 3.7
  Top Layer w0.2: U4.6@53.157,9.1 53.811,9.1 55.602,10.891 D2.36
IO23: D2.37 U4.7 | length 4.9
  Top Layer w0.2: U4.7@53.157,8.6 54.214,8.6 56.554,10.94 D2.37
IO25: D2.10 U5.6 | length 8.4
  Top Layer w0.2: D2.10 46.712,30.5 46.963,30.751 48.334,30.751 48.531,30.554 50.791,30.554 52.041,31.804 U5.6
IO26: D2.11 U5.7 | length 9.4
  Top Layer w0.2: D2.11 45.442,29.725 46.818,31.101 48.479,31.101 48.676,30.904 50.646,30.904 52.046,32.304 U5.7
IO27: D2.12 J2.15 J2.16 | length 33
  Top Layer w0.2: J2.15 24.757,37.7 34.531,37.7 36.082,36.149 36.082,32.606 41.974,32.606 44.172,30.409 D2.12
  Bottom Layer w0.2: J2.16 J2.15
IO33: D2.9 J2.13 J2.14 | length 26.9
  Top Layer w0.2: D2.9 v1(47.982,29.901)
  Bottom Layer w0.2: J2.14 J2.13 28.637,33.1 44.783,33.1 v1(47.982,29.901)
NetC6_2: C6.2 SW3.2 U6.2 | length 20.5
  Top Layer w0.2: v1(17.977,23.7) 18.267,23.7 20.522,21.445 20.522,19.574 C6.2
  Bottom Layer w0.2: SW3.2 6.709,25.685 14.015,25.685 16,23.7 v1(17.977,23.7)
NetC7_1: C7.1 R4.2 | length 1.4
  Top Layer w0.2: C7.1 18.705,29.557 R4.2
NetC7_2: C7.2 U6.6 | length 6.2
  Top Layer w0.2: C7.2 17.78,26.077 18.765,25.091 18.984,25.091 18.988,25.088 21.766,25.088 21.792,25.113 U6.6
NetC8_1: C8.1 U6.1 | length 4.7
  Top Layer w0.2: C8.1 18.755,16.132 18.755,19.46 19.252,19.957 U6.1
NetC8_2: C8.2 D8.2 L1.1 U6.3 | length 16.1
  Top Layer w0.2: D8.2 16.399,25.393 17.172,25.393 18.115,24.45 18.451,24.45 18.706,24.195 19.066,24.195 21.792,21.47 21.792,17.069 C8.2 21.22,15.216 L1.1@23.257,15.216
NetD1_1: D1.1 R1.1 | length 1.5
  Top Layer w0.2: R1.1 3.481,23.18 D1.1
NetD7_2: D7.2 SW3.1 | length 7.5
  Top Layer w0.2: D7.2 3.731,31.203 SW3.1
NetQ1_1: Q1.1 R21.2 | length 15.8
  Top Layer w0.2: R21.2 31.754,14.491 31.8,14.445 35.713,14.445 36.209,14.94 36.209,16.452 38.387,18.631 38.387,22.46 Q1.1
NetQ2_1: Q2.1 R22.2 | length 1.4
  Top Layer w0.2: R22.2 Q2.1
NetR5_1: R5.1 R6.2 U6.5 | length 9.9
  Top Layer w0.2: R5.1 19.806,26.637 23.036,26.637 23.062,26.612 U6.5 23.062,22.386 R6.2
RSTb: J5.1 R24.2 U1.9 | length 9.7
  Top Layer w0.2: J5.1 26.701,22.456 R24.2 R24.2@27.896,22.494 ; v1(27.74,20.2) 27.864,20.2 28.971,21.307 28.971,21.817 29.206,22.052 29.646,22.052 U1.9@29.646,22.152
  Bottom Layer w0.2: J5.1 26.02,23.137 26.02,21.6 27.582,20.038 27.74,20.197 v1(27.74,20.2)
RTSb: Q1.2 R22.1 U1.19 | length 11.4
  Top Layer w0.2: R22.1 34.033,18.103 35.611,18.103 ; U1.19 33.55,20.231 33.516,20.197 35.611,18.103 ; Q1.2 37.021,21.92 37.021,21.456 37.363,21.114 37.363,19.805 35.662,18.103 35.611,18.103
RXD: R17.2 U1.20 | length 1.2
  Top Layer w0.2: U1.20 34.363,21.092 R17.2
RXD0: D2.34 R18.1 | length 25.2
  Top Layer w0.2: R18.1 36.107,21.842 36.107,21.062 v1(36.513,20.655) ; D2.34 v1(53.062,16.045)
  Bottom Layer w0.2: v1(36.513,20.655) 48.452,20.655 v1(53.062,16.045)
TXD: R18.2 U1.21 | length 1.5
  Top Layer w0.2: U1.21 33.55,21.692 33.991,21.692 34.627,22.328 R18.2
TXD0: D2.35 R17.1 | length 25.3
  Top Layer w0.2: R17.1 35.65,21.283 v1(35.65,19.309) ; v1(54.298,13.6) 54.298,11.459 D2.35
  Bottom Layer w0.2: v1(35.65,19.309) 43.183,19.309 48.893,13.6 v1(54.298,13.6)
USB_DN: D4.2 J1.2 U1.4 | length 35.7
  Top Layer w0.2: J1.2 10.097,15.088 10.126,15.117 10.126,16.579 10.151,16.604 13.1,16.604 v1(15.028,18.532) ; v1(30.7,25) 30.731,25 31.346,24.385 U1.4@31.346,23.852
  Bottom Layer w0.2: v1(15.028,18.532) 27.632,18.532 28.971,19.871 28.971,24.68 30.236,24.68 30.556,25 v1(30.7,25)
USB_DP: D5.2 J1.3 U1.3 | length 45.4
  Top Layer w0.2: J1.3 5.518,14.438 v1(8.357,11.6) 10.073,11.6 D5.2 D5.2@10.126,11.905 ; v1(34.761,24.885) 34.209,25.436 32.373,25.436 31.822,24.885 ; 31.822,24.885 31.796,24.859 31.796,24.195 31.822,24.885
  Bottom Layer w0.2: v1(8.357,11.6) 21.609,11.6 30.709,20.7 32.7,20.7 32.7,22.544 34.761,24.605 v1(34.761,24.885)
VBUS: D3.1 D6.2 J1.1 R25.1 | length 19.1
  Top Layer w0.2: D3.1 2.289,19.842 3.265,18.867 3.265,15.764 3.29,15.739 8.128,15.739 R25.1 9.539,17.262 9.539,22.453 D6.2
VBUS_DETECT: R25.2 R26.2 U1.8 | length 21.8
  Top Layer w0.2: R25.2 R26.2 11.556,17.75 v1(13.571,19.765) ; v1(26.18,20.1) 27.2,21.12 28.02,21.12 28.571,21.671 28.571,21.9 28.621,21.95 28.621,21.967 29.206,22.552 29.646,22.552 U1.8@29.646,22.652
  Bottom Layer w0.2: v1(13.571,19.765) 13.906,20.1 v1(26.18,20.1)
pads on no net: D2.4 D2.5 D2.6 D2.7 D2.8 D2.17 D2.18 D2.19 D2.21 D2.22 D2.27 D2.28 D2.29 D2.30 D2.31 D2.32 J1. J1.4 J1.8 J1.11 J4. SW1.3 SW1.4 SW2.3 SW2.4 SW3.3 U1.10 U1.11 U1.12 U1.13 U1.14 U1.16 U1.17 U1.18 U1.22 U1.24 U1.25 U6.7 U6.8
copper on no net:
  other v2: 31.05,21.292 32.15,21.292 31.05,22.392 32.15,22.392

## Polygon pours and split planes (outlines as drawn)
GND on Top Layer "Top Layer-GND" (solid, remove dead copper, pour order 4): -9.943,-4.3 -9.943,45.7 59.057,45.7 59.057,-4.3
GND on Bottom Layer "Bottom Layer-GND" (solid, remove dead copper, pour order 5): -9.943,-4.3 -9.943,45.7 59.057,45.7 59.057,-4.3

## Silkscreen, mask and mechanical layers (free items; w line width, h text height)
Top Overlay:
  text "EXT9V" at 31.657,39.708 h1.2 r270
  text "(POWER)" at 0.532,39.6 h1.2 r270
  text "IO12" at 8.8,38.9 h1.2 r270
  text "IO12" at 11.357,38.9 h1.2 r270
  text "IO14" at 13.857,38.9 h1.2 r270
  text "IO14" at 16.5,38.9 h1.2 r270
  text "IO27" at 18.905,38.9 h1.2 r270
  text "IO33" at 24.007,38.9 h1.2 r270
  text "IO27" at 21.4,38.8 h1.2 r270
  text "IO33" at 26.577,38.8 h1.2 r270
  text "3V3" at 56.857,38.4 h1.2 r270
  text "DI2" at 44.5,38.3 h1.2 r270
  text "CI2" at 41.8,38.2 h1.2 r270
  text "DI2" at 46.9,38.2 h1.2 r270
  text "CI2" at 39.225,38.1 h1.2 r270
  text "5V" at 36.707,38 h1.2 r270
  text "EN" at 54.5,38 h1.2 r270
  text "5V" at 33.991,37.9 h1.2 r270
  text "GND" at 5.477,36.8 h1.2
  text "GND" at 28.255,36.7 h1.2
  text "GND" at 48.676,36.678 h1.2
  text "GND" at 51.349,36.683 h1.2
  text "GND" at 3.587,7.467 h1.2
  text "EXT9V" at 3.706,6.4 h1.2
  text "IO13" at 8.737,2.501 h1.2 r270
  text "IO13" at 11.399,2.501 h1.2 r270
  text "CLK" at 13.8,2.52 h1.2 r270
  text "IO15" at 16.074,2.5 h1.2 r270
  text "IO15" at 18.9,2.5 h1.2 r270
  text "IO2" at 21.5,2.5 h1.2 r270
  text "IO2" at 23.8,2.5 h1.2 r270
  text "IO0" at 26.517,2.501 h1.2 r270
  text "IO4" at 29.057,2.501 h1.2 r270
  text "IO4" at 31.597,2.501 h1.2 r270
  text "IO21" at 34.1,2.5 h1.2 r270
  text "DI1" at 44.2,2.5 h1.2 r270
  text "DI1" at 46.8,2.501 h1.2 r270
  text "CI1" at 49.252,2.5 h1.2 r270
  text "CI1" at 51.6,2.5 h1.2 r270
  text "5V" at 54.4,2.501 h1.2 r270
  text "5V" at 56.882,2.501 h1.2 r270
  text "GND" at 5.555,1.6 h1.2
  text "GND" at 35.9,1.436 h1.2
  text "GND" at 38.526,1.4 h1.2
  text "GND" at 41.138,1.4 h1.2
Mechanical 3:
  lines w0.254: 0,0.2 59.057,0.2 59.057,40.3 0,40.3 0,0.2

## Dimensions
57.357,4.08 to 57.417,34.8 on Mechanical 8
65.732,12 to 57.357,4.32 on Mechanical 8
6.557,4.32 to 0.1,3.5 on Mechanical 8
0,-10.9 to -1.545,-10.9 on Mechanical 8
0,0.2 to 65.732,10.85 on Mechanical 8
65.732,10.85 to -1.545,24.679 on Mechanical 8
59.057,0.2 to 65.632,11 on Mechanical 8
59.057,40.3 to 59.057,0.2 on Mechanical 8
0,0.2 to 59.057,0.2 on Mechanical 8

## Text inside footprints (layer, text, board x,y; h text height)
J1: Mechanical 1 "PCB EDGE" at 0,21.638 h0.3 r270